# Altium PCB slave-14-mc33775.PcbDoc (part 5 of 5)
Units mil, origin at the board's own origin, x right, y up, seen from the top; angles counter-clockwise.
Board outline 6512.5 x 4562.01 mil, 6 copper layers (Top Copper, Supply, Signal Layer 1, Signal Layer 2, GND, Bot Copper), stack 69.773 mil thick; 427 components, 0 nets, 1131 pads, 1672 vias.
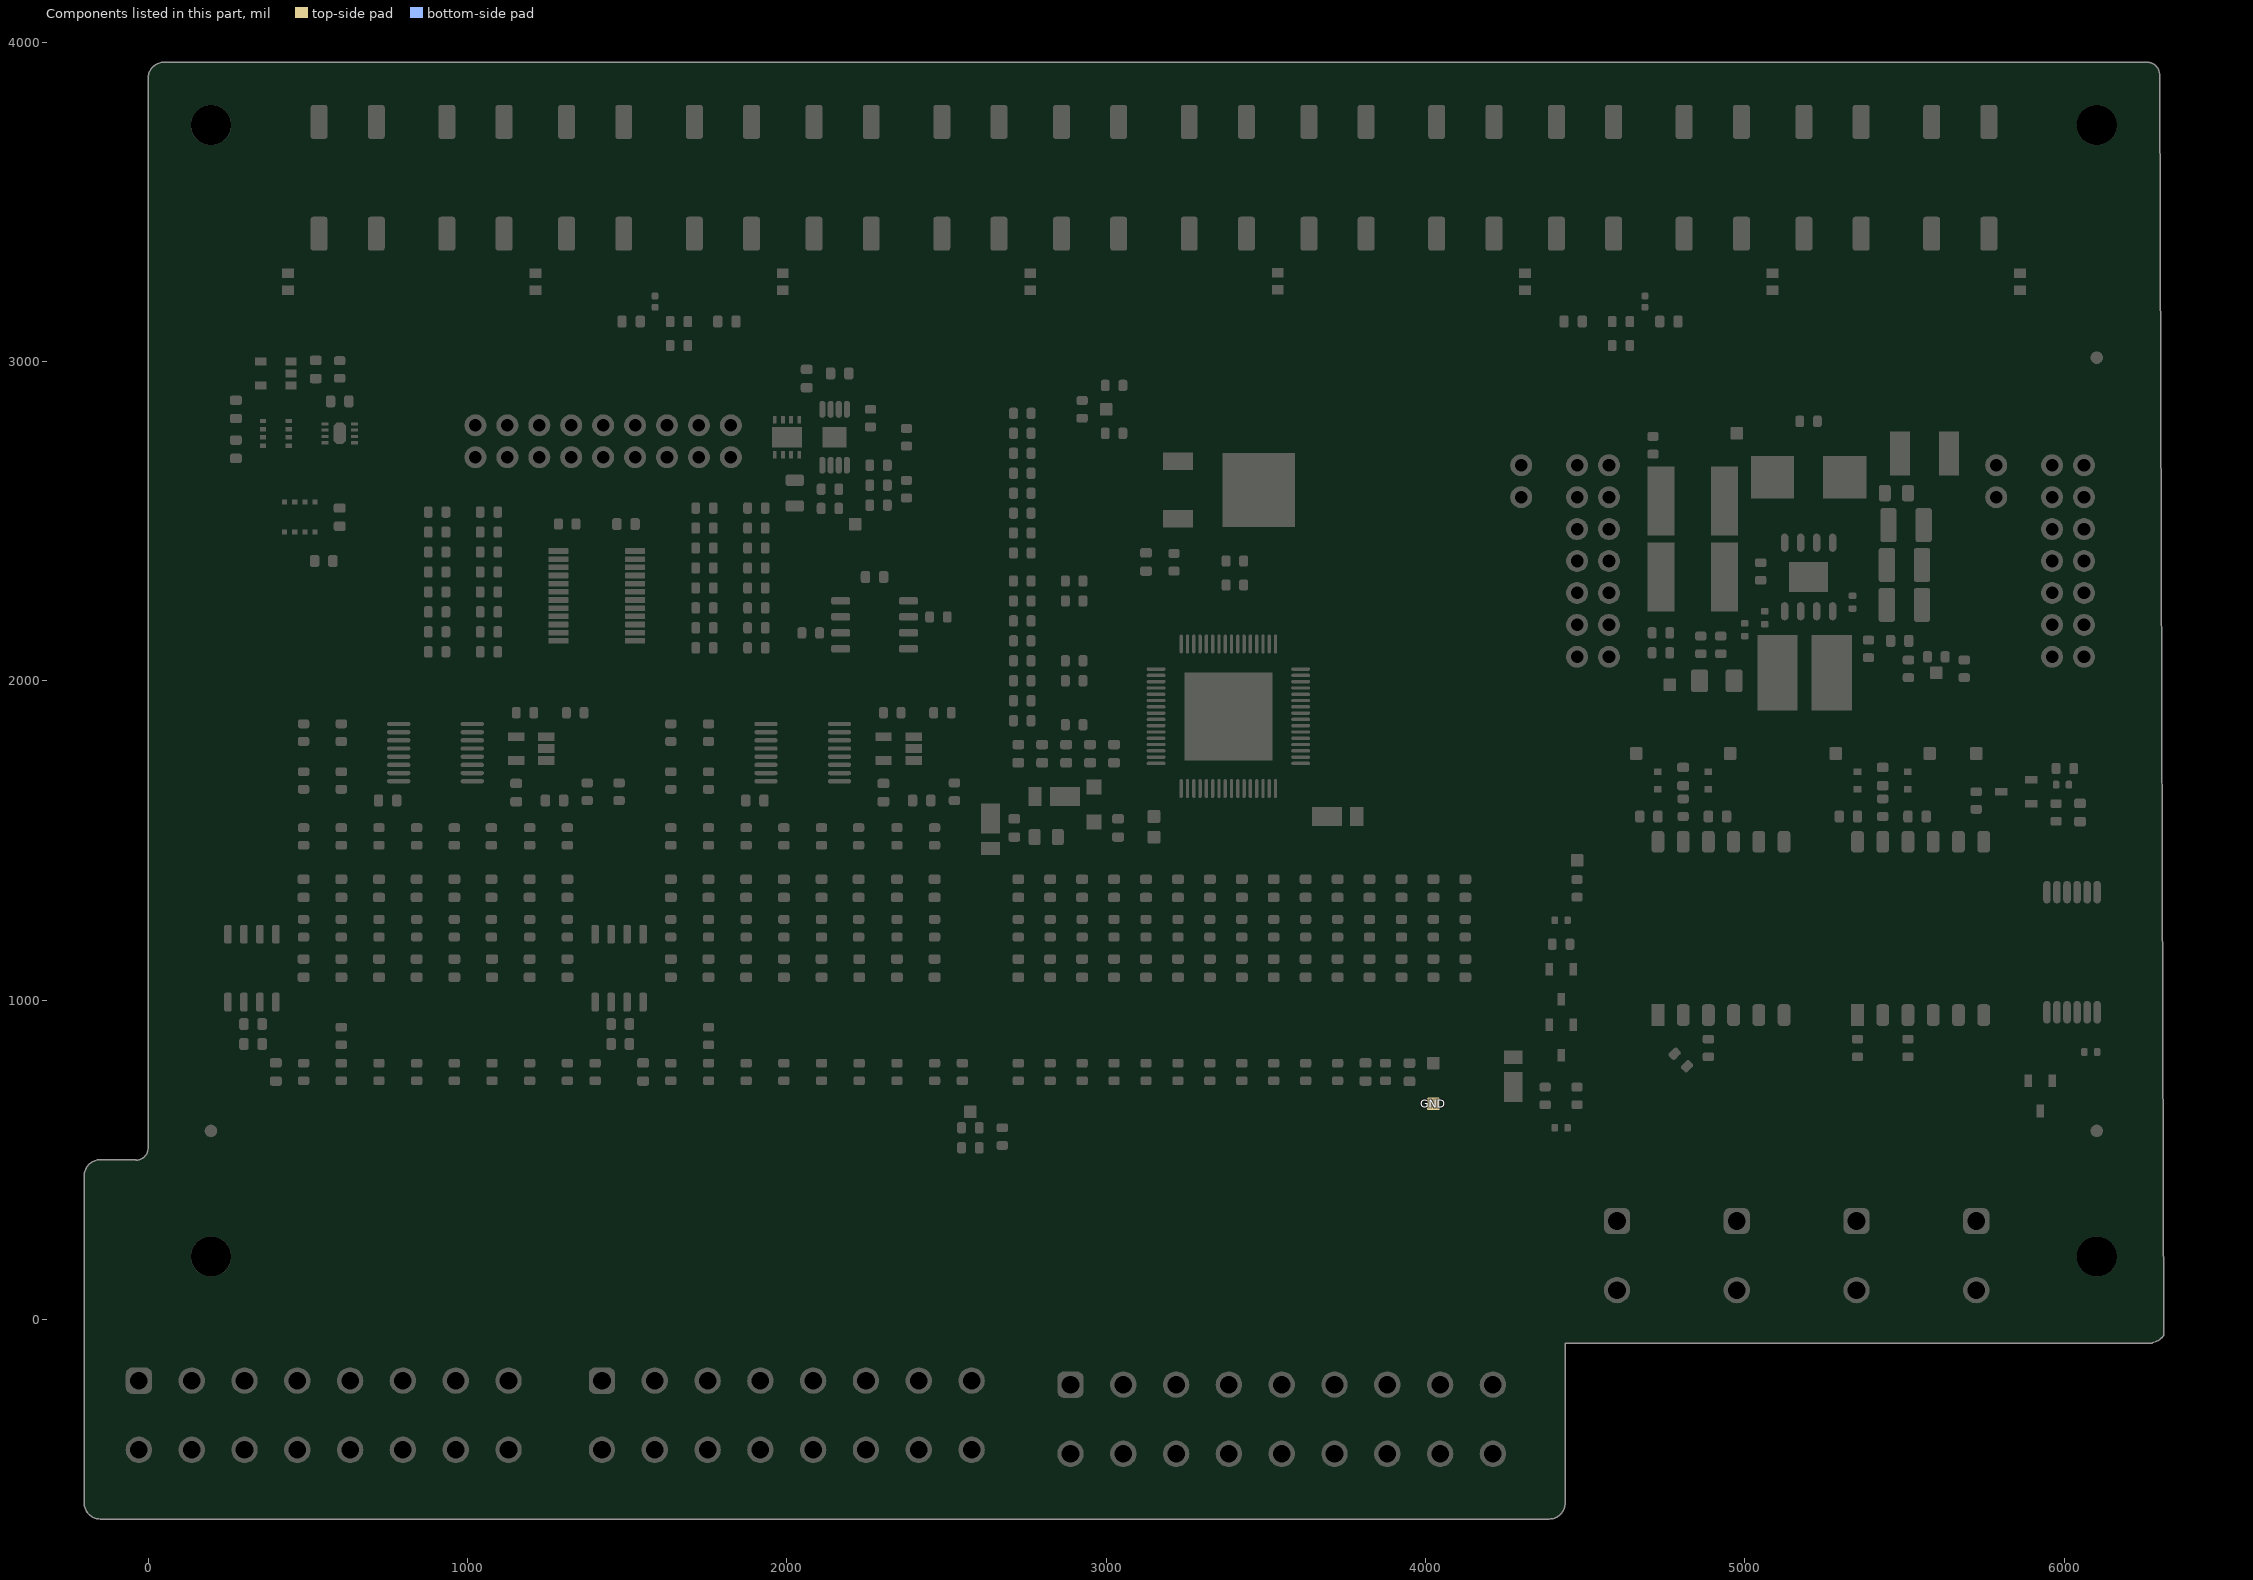
[diagram p9: the components of this part, seen from the top]

## Polygon pours and split planes (outlines as drawn) (continued)
no net on Signal Layer 1 "CIN8_L03_P022" (solid, pour order 22): 2587.5,3975 2937.5,3975 2937.5,3250 2587.5,3250
no net on Signal Layer 1 "BAL.CB_HI8_L03_P117" (solid, pour order 117): 2962.5,3975 3137.5,3975 3137.5,3250 2962.5,3250
no net on Signal Layer 1 "CIN4_L03_P090" (solid, pour order 90): 4137.5,3975 4487.5,3975 4487.5,3250 4137.5,3250
no net on Signal Layer 1 "BAL.CB_LO0_L03_P083" (solid, pour order 83): 5662.5,3975 5487.5,3975 5487.5,3250 5662.5,3250
no net on Signal Layer 1 "BAL.CB_LO4_L03_P081" (solid, pour order 81): 4112.5,3975 3937.5,3975 3937.5,3250 4112.5,3250
no net on Signal Layer 1 "BAL.CB_LO10_L03_P078" (solid, pour order 78): 1787.5,3975 1612.5,3975 1612.5,3250 1787.5,3250
no net on Signal Layer 1 "BAL.CB_HI4_L03_P075" (solid, pour order 75): 4512.5,3975 4687.5,3975 4687.5,3250 4512.5,3250
no net on Signal Layer 1 "BAL.CB_HI6_L03_P074" (solid, pour order 74): 3737.5,3975 3912.5,3975 3912.5,3250 3737.5,3250
no net on Signal Layer 1 "BAL.CB_HI14_L03_P070" (solid, pour order 70): 637.5,3975 812.5,3975 812.5,3250 637.5,3250
no net on Signal Layer 1 "CIN10_L03_P065" (solid, pour order 65): 1812.5,3975 2162.5,3975 2162.5,3250 1812.5,3250
no net on Signal Layer 1 "CIN6_L02_P023" (solid, pour order 67): 3362.5,3975 3712.5,3975 3712.5,3250 3362.5,3250
no net on Signal Layer 1 "CIN12_L03_P064" (solid, pour order 64): 1037.5,3975 1387.5,3975 1387.5,3250 1037.5,3250
no net on Signal Layer 1 "CIN2_L03_P069" (solid, pour order 69): 4912.5,3975 5262.5,3975 5262.5,3250 4912.5,3250
no net on Signal Layer 1 "BAL.CB_LO2_L03_P060" (solid, pour order 60): 4887.5,3975 4712.5,3975 4712.5,3250 4887.5,3250
no net on Signal Layer 1 "BAL.CB_LO6_L03_P058" (solid, pour order 58): 3337.5,3975 3162.5,3975 3162.5,3250 3337.5,3250
no net on Signal Layer 1 "BAL.CB_LO8_L03_P057" (solid, pour order 57): 2562.5,3975 2387.5,3975 2387.5,3250 2562.5,3250
no net on Signal Layer 1 "BAL.CB_LO12_L03_P055" (solid, pour order 55): 1012.5,3975 837.5,3975 837.5,3250 1012.5,3250
no net on Signal Layer 1 "BAL.CB_HI2_L03_P054" (solid, pour order 54): 5287.5,3975 5462.5,3975 5462.5,3250 5287.5,3250
no net on Signal Layer 1 "BAL.CB_HI10_L03_P050" (solid, pour order 50): 2187.5,3975 2362.5,3975 2362.5,3250 2187.5,3250
no net on Signal Layer 1 "BAL.CB_HI12_L03_P049" (solid, pour order 49): 1412.5,3975 1587.5,3975 1587.5,3250 1412.5,3250
no net on Signal Layer 2 "CIN0_L04_P085" (solid, pour order 85): 5687.5,3975 5687.5,3250 6299.21,3250 6299.21,3975
no net on Signal Layer 2 "CIN14_L04_P084" (solid, pour order 84): 612.5,3975 612.5,3250 0,3250 0,3975
no net on Signal Layer 2 "CIN6_L04_P045" (solid, pour order 45): 3362.5,3975 3712.5,3975 3712.5,3250 3362.5,3250
no net on Signal Layer 2 "CIN8_L04_P132" (solid, pour order 132): 2587.5,3975 2937.5,3975 2937.5,3250 2587.5,3250
no net on Signal Layer 2 "CIN10_L04_P109" (solid, pour order 109): 1812.5,3975 2162.5,3975 2162.5,3250 1812.5,3250
no net on Signal Layer 2 "BAL.CB_LO0_L04_P105" (solid, pour order 105): 5662.5,3975 5487.5,3975 5487.5,3250 5662.5,3250
no net on Signal Layer 2 "BAL.CB_LO10_L04_P100" (solid, pour order 100): 1787.5,3975 1612.5,3975 1612.5,3250 1787.5,3250
no net on Signal Layer 2 "BAL.CB_HI14_L04_P092" (solid, pour order 92): 637.5,3975 812.5,3975 812.5,3250 637.5,3250
no net on Signal Layer 2 "CIN2_L04_P091" (solid, pour order 91): 4912.5,3975 5262.5,3975 5262.5,3250 4912.5,3250
no net on Signal Layer 2 "CIN12_L04_P086" (solid, pour order 86): 1037.5,3975 1387.5,3975 1387.5,3250 1037.5,3250
no net on Signal Layer 2 "BAL.CB_LO2_L04_P082" (solid, pour order 82): 4887.5,3975 4712.5,3975 4712.5,3250 4887.5,3250
no net on Signal Layer 2 "BAL.CB_LO6_L04_P080" (solid, pour order 80): 3337.5,3975 3162.5,3975 3162.5,3250 3337.5,3250
no net on Signal Layer 2 "BAL.CB_LO8_L04_P079" (solid, pour order 79): 2562.5,3975 2387.5,3975 2387.5,3250 2562.5,3250
no net on Signal Layer 2 "BAL.CB_LO12_L04_P077" (solid, pour order 77): 1012.5,3975 837.5,3975 837.5,3250 1012.5,3250
no net on Signal Layer 2 "BAL.CB_HI10_L04_P072" (solid, pour order 72): 2187.5,3975 2362.5,3975 2362.5,3250 2187.5,3250
no net on Signal Layer 2 "BAL.CB_HI12_L04_P071" (solid, pour order 71): 1412.5,3975 1587.5,3975 1587.5,3250 1412.5,3250
no net on Signal Layer 2 "BAL.CB_HI4_L04_P097" (solid, pour order 97): 4512.5,3975 4687.5,3975 4687.5,3250 4512.5,3250
no net on Signal Layer 2 "BAL.CB_HI2_L04_P076" (solid, pour order 76): 5287.5,3975 5462.5,3975 5462.5,3250 5287.5,3250
no net on Signal Layer 2 "BAL.CB_HI8_L04_P029" (solid, pour order 29): 2962.5,3975 3137.5,3975 3137.5,3250 2962.5,3250
no net on Signal Layer 2 "CIN4_L04_P068" (solid, pour order 68): 4137.5,3975 4487.5,3975 4487.5,3250 4137.5,3250
no net on Signal Layer 2 "BAL.CB_LO4_L04_P059" (solid, pour order 59): 4112.5,3975 3937.5,3975 3937.5,3250 4112.5,3250
no net on Signal Layer 2 "BAL.CB_HI6_L04_P052" (solid, pour order 52): 3737.5,3975 3912.5,3975 3912.5,3250 3737.5,3250

## Keep-outs
Keep-Out Layer:
  circle w228.35: c196.85,196.85 r185.04
  circle w228.35: c6102.36,196.85 r185.04
  circle w228.35: c196.85,3740.16 r185.04
  circle w228.35: c6102.36,3740.16 r185.04

## Other copper
Top Copper:
  pour cut-out: 3987.5,1737.5 4112.5,1737.5 4112.5,1512.5 3987.5,1512.5
  pour cut-out: 5725,2737.5 5850,2737.5 5850,2512.5 5725,2512.5
  pour cut-out: 4237.5,2737.5 4362.5,2737.5 4362.5,2512.5 4237.5,2512.5
  pour cut-out: 362.5,2625 700,2625 700,2300 687.5,2287.5 362.5,2287.5
  text "TOP (1)" at 6244.68,3056.1 h40 r90
Signal Layer 1:
  pour cut-out: 3987.5,1737.5 4112.5,1737.5 4112.5,1512.5 3987.5,1512.5
  pour cut-out: 5725,2737.5 5850,2737.5 5850,2512.5 5725,2512.5
  pour cut-out: 4237.5,2737.5 4362.5,2737.5 4362.5,2512.5 4237.5,2512.5
  text "3" at 6244.68,3056.1 h40 r90
Signal Layer 2:
  pour cut-out: 3987.5,1737.5 4112.5,1737.5 4112.5,1512.5 3987.5,1512.5
  pour cut-out: 5725,2737.5 5850,2737.5 5850,2512.5 5725,2512.5
  pour cut-out: 4237.5,2737.5 4362.5,2737.5 4362.5,2512.5 4237.5,2512.5
  text "4" at 6244.69,3193.9 h40 r90
Supply:
  pour cut-out: 3987.5,1737.5 4112.5,1737.5 4112.5,1512.5 3987.5,1512.5
  pour cut-out: 5725,2737.5 5850,2737.5 5850,2512.5 5725,2512.5
  pour cut-out: 4237.5,2737.5 4362.5,2737.5 4362.5,2512.5 4237.5,2512.5
  pour cut-out: 4603.33,1516.81 4607.64,1516.81 4628.33,1537.5 6337.5,1537.5 6450,1425 6450,-50 4787.5,-50 4790.83,-46.67 4787.5,662.5 4607.64,825
  pour cut-out: 362.5,2625 700,2625 700,2300 687.5,2287.5 362.5,2287.5
  pour cut-out: 6350,1300 5900,1300 5900,1500 6050,1500 6350,1800 6450,1800 6450,1675 6350,1575
  pour cut-out: 4825,150 4800,500 4475,175 4350,50 4350,-50 4800,-50 4825,-25
  text "2" at 6244.68,3056.1 h40 r90
GND:
  pour cut-out: 3987.5,1737.5 4112.5,1737.5 4112.5,1512.5 3987.5,1512.5
  pour cut-out: 5725,2737.5 5850,2737.5 5850,2512.5 5725,2512.5
  pour cut-out: 4237.5,2737.5 4362.5,2737.5 4362.5,2512.5 4237.5,2512.5
  pour cut-out: 4603.33,1516.81 4607.64,1516.81 4628.33,1537.5 6337.5,1537.5 6450,1425 6450,-50 4787.5,-50 4790.83,-46.67 4787.5,662.5 4607.64,825
  pour cut-out: 4825,150 4800,500 4475,175 4350,50 4350,-50 4800,-50 4825,-25
  pour cut-out: 6350,1300 5900,1300 5900,1500 6050,1500 6350,1800 6450,1800 6450,1675 6350,1575
  pour cut-out: 362.5,2625 700,2625 700,2300 687.5,2287.5 362.5,2287.5
  text "5" at 6244.69,3193.9 h40 r90
Bot Copper:
  pour cut-out: 3987.5,1737.5 4112.5,1737.5 4112.5,1512.5 3987.5,1512.5
  pour cut-out: 5725,2737.5 5850,2737.5 5850,2512.5 5725,2512.5
  pour cut-out: 4237.5,2737.5 4362.5,2737.5 4362.5,2512.5 4237.5,2512.5
  text "BOT (6)" at 6244.69,3193.9 h40 r90

## Silkscreen, mask and mechanical layers (free items; w line width, h text height)
Top Overlay:
  drawing of 11 lines, arcs and shapes, not listed
  text "Passive Balancing" at 2693.42,3548.33 h118.11
  text "MCP9800" at 212.8,2885.14 h40 r90
  text "SHT35" at 775.3,2708.04 h40 r90
  text "BME280" at 212.64,2707.63 h40 r90
  text "↯" at 3787.5,2700 h1200
  text "HIGH" at 1700.4,2587.2 h40
  text "LOW" at 1864.61,2587.2 h40
  text "LOW" at 864.61,2574.7 h40
  text "HIGH" at 1025.4,2574.7 h40
  text "DANGER / high voltage / may be present" at 3637.36,2529.74 h60
  text "15" at 1805.76,2528.11 h40
  text "0" at 977.86,2515.61 h40
  text "14" at 1805.62,2465.38 h40
  text "1" at 980.56,2452.88 h40
  text "BME680" at 557.63,2412.36 h40
  text "13" at 1805.97,2403.11 h40
  text "2" at 977.58,2390.38 h40
  text "12" at 1806.11,2340.38 h40
  text "3" at 977.66,2328.11 h40
  text "11" at 1808.12,2277.88 h40
  text "4" at 976.98,2265.39 h40
  text "10" at 1806.09,2215.61 h40
  text "5" at 977.58,2203.34 h40
  text "9" at 1815.13,2153.11 h40
  text "6" at 977.63,2140.61 h40
  text "8" at 1815.25,2090.61 h40
  text "7" at 977.8,2078.11 h40
  text "foxBMS" at 3775,1950 h150
  text "Fraunhofer IISB / '.GlobalProject' v'.GlobalVersion'" at 177,1361.5 h60 r90
  text "CT1" at 3987.82,1291.44 h40 r90
  text "CT9" at 3187.8,1289.36 h40 r90
  text "CT8" at 3287.8,1289.32 h40 r90
  text "CT7" at 3387.82,1289.32 h40 r90
  text "CT6" at 3487.8,1289.16 h40 r90
  text "CT5" at 3587.8,1289.07 h40 r90
  text "CT4" at 3687.82,1288.94 h40 r90
  text "CT3" at 3787.8,1289.29 h40 r90
  text "CT2" at 3887.82,1289.42 h40 r90
  text "CT0" at 4087.8,1289.41 h40 r90
  text "CT11" at 2987.82,1281.5 h40 r90
  text "CT14" at 2687.82,1279 h40 r90
  text "CT13" at 2787.8,1279.35 h40 r90
  text "CT12" at 2887.82,1279.48 h40 r90
  text "CT10" at 3087.8,1279.47 h40 r90
  text "Input Filter" at 3125,920.96 h118.11
  text "Select Vmodule with 0R" at 2923.32,668.27 h60
  text "Temperature Measurement" at 801.55,622.64 h118.11
  text "Alarm / out" at 4525.66,594.9 h60
  text "Alarm / in" at 5675.66,594.88 h60
  text "TPL / low" at 4865.03,587.26 h60
  text "TPL / high" at 5240.03,587.26 h60
Bottom Overlay:
  text "DIO3" at 1234.97,2874.76 h40
  text "DIO7" at 1434.97,2874.76 h40
  text "DIO11" at 1634.97,2874.76 h40
  text "DIO15" at 1834.97,2874.76 h40
  text "DIO1" at 1134.98,2836.77 h40
  text "DIO5" at 1334.97,2836.77 h40
  text "DIO9" at 1534.97,2836.77 h40
  text "DIO13" at 1734.97,2836.77 h40
  text "GND" at 1934.97,2836.77 h40
  text "GND" at 4438.23,2784.97 h40 r90
  text "GND" at 4695.24,2784.97 h40 r90
  text "GND" at 5925.73,2784.97 h40 r90
  text "GND" at 6182.74,2784.97 h40 r90
  text "GND" at 4409.97,2711.77 h40
  text "GND" at 5897.47,2711.77 h40
  text "VAUX" at 4438.23,2684.97 h40 r90
  text "VDDC" at 4737.74,2684.97 h40 r90
  text "VAUX" at 5925.73,2684.97 h40 r90
  text "VDDC" at 6225.24,2684.97 h40 r90
  text "3.3V" at 4438.23,2584.97 h40 r90
  text "VDDIO" at 4695.24,2584.97 h40 r90
  text "3.3V" at 5925.73,2584.97 h40 r90
  text "VDDIO" at 6182.74,2584.97 h40 r90
  text "DIO0" at 1134.98,2579.76 h40
  text "DIO4" at 1334.97,2579.76 h40
  text "DIO8" at 1534.97,2579.76 h40
  text "DIO12" at 1734.97,2579.76 h40
  text "GND" at 1934.97,2579.76 h40
  text "DIO2" at 1234.97,2537.26 h40
  text "DIO6" at 1434.97,2537.26 h40
  text "DIO10" at 1634.97,2537.26 h40
  text "DIO14" at 1834.97,2537.26 h40
  text "ALRM_OUT" at 4400.24,2484.97 h40 r90
  text "ALRM_IN" at 4737.74,2484.97 h40 r90
  text "ALRM_OUT" at 5887.74,2484.97 h40 r90
  text "ALRM_IN" at 6225.24,2484.97 h40 r90
  text "VBAT" at 4409.97,2454.76 h40
  text "VBAT" at 5897.47,2454.76 h40
  text "SDA" at 4438.23,2384.97 h40 r90
  text "SCL" at 4695.24,2384.97 h40 r90
  text "SDA" at 5925.73,2384.97 h40 r90
  text "SCL" at 6182.74,2384.97 h40 r90
  text "GPIO7" at 4400.24,2284.97 h40 r90
  text "GPIO6" at 4737.74,2284.97 h40 r90
  text "GPIO7" at 5887.74,2284.97 h40 r90
  text "GPIO6" at 6225.24,2284.97 h40 r90
  text "GPIO3" at 4438.23,2184.97 h40 r90
  text "GPIO2" at 4695.24,2184.97 h40 r90
  text "GPIO3" at 5925.73,2184.97 h40 r90
  text "GPIO2" at 6182.74,2184.97 h40 r90
  text "GND" at 4159.97,1711.77 h40
  text "VBAT_ext" at 4159.97,1454.76 h40
  text "Alarm / out" at 4674.34,594.9 h60
  text "Alarm / in" at 5824.34,594.88 h60
  text "TPL / low" at 5084.97,587.26 h60
  text "TPL / high" at 5459.97,587.26 h60
  text "GND" at 596.98,524.76 h40
  text "GND" at 714.97,524.76 h40
  text "GND" at 832.97,524.76 h40
  text "GND" at 950.96,524.76 h40
  text "GND" at 1068.99,524.76 h40
  text "GND" at 1186.98,524.76 h40
  text "GND" at 1304.97,524.76 h40
  text "GND" at 1422.97,524.76 h40
  text "GND" at 1746.98,524.76 h40
  text "GND" at 1864.97,524.76 h40
  text "GND" at 1982.97,524.76 h40
  text "GND" at 2100.96,524.76 h40
  text "GND" at 2218.99,524.76 h40
  text "GND" at 2336.98,524.76 h40
  text "GND" at 2454.97,524.76 h40
  text "GND" at 2572.97,524.76 h40
  text "NC" at 2909.97,524.76 h40
  text "NC" at 3023.99,524.76 h40
  text "NC" at 3141.98,524.76 h40
  text "NC" at 3259.97,524.76 h40
  text "CIN14" at 3377.97,524.76 h40
  text "CIN12" at 3495.96,524.76 h40
  text "CIN10" at 3613.99,524.76 h40
  text "CIN8" at 3731.98,524.76 h40
  text "CIN6" at 3849.97,524.76 h40
  text "CIN4" at 3967.97,524.76 h40
  text "CIN2" at 4085.96,524.76 h40
  text "CIN0" at 4204.46,524.76 h40
  text "N" at 4622.47,437.26 h60
  text "N" at 4902.78,437.26 h60
  text "N" at 5277.77,437.26 h60
  text "N" at 5652.77,437.26 h60
  text "P" at 4622.47,319.27 h60
  text "P" at 4902.21,318.51 h60
  text "P" at 5277.21,318.51 h60
  text "P" at 5652.21,318.51 h60
  text "T15" at 596.98,249.76 h60
  text "T14" at 714.97,249.76 h60
  text "T13" at 832.97,249.76 h60
  text "T12" at 950.96,249.76 h60
  text "T11" at 1068.99,249.76 h60
  text "T10" at 1186.98,249.76 h60
  text "T9" at 1304.97,249.76 h60
  text "T8" at 1422.97,249.76 h60
  text "T7" at 1746.98,249.76 h60
  text "T6" at 1864.97,249.76 h60
  text "T5" at 1982.97,249.76 h60
  text "T4" at 2100.96,249.76 h60
  text "T3" at 2218.99,249.76 h60
  text "T2" at 2336.98,249.76 h60
  text "T1" at 2454.97,249.76 h60
  text "T0" at 2572.97,249.76 h60
  text "NC" at 2905.49,249.76 h40
  text "NC" at 3023.99,249.76 h40
  text "NC" at 3141.98,249.76 h40
  text "VBAT" at 3259.97,249.76 h40
  text "CIN13" at 3377.97,249.76 h40
  text "CIN11" at 3495.96,249.76 h40
  text "CIN9" at 3613.99,249.76 h40
  text "CIN7" at 3731.98,249.76 h40
  text "CIN5" at 3849.97,249.76 h40
  text "CIN3" at 3967.97,249.76 h40
  text "CIN1" at 4085.96,249.76 h40
  text "GND" at 4204.46,249.76 h40
Mechanical 1:
  lines w78.74: 225,3100 775,3100 ; 700,2337.5 650,2287.5 387.5,2287.5 337.5,2337.5 337.5,2587.5 387.5,2637.5 650,2637.5 700,2587.5 ; 4787.5,100 4787.5,675 4625,837.5 4625,1350 5037.5,1350 ; 4812.5,1112.5 5237.5,1112.5 ; 5162.5,100 5162.5,875 5237.5,950 5237.5,962.5 5237.5,1350 5675,1350 ; 5450,1112.5 5875,1112.5 ; 5537.5,100 5537.5,612.5 5837.5,912.5 5837.5,1012.5 5875,1050 5875,1225 6025,1225 6025.77,1225 6095.79,1154.98 6129.98,1154.98 6187.5,1212.5 6200,1225 6200,1400 6150,1450
Board_Outline:
  lines w5.91: -39.37,498.13 ccw(c-39.37,537.5) 0,537.5 0,3887.01 cw(c50,3887.01) 50,3937.01 6259.84,3937.01 cw(c6259.84,3897.64) 6299.21,3897.64 6312.42,-50 ; 6276.09,-73.41 ccw(c6262.92,-12.92) 6312.5,-50
  lines w10: -37.5,500 -150,500 ccw(c-150,450) -200,450 -200,-575 ccw(c-150,-575) -150,-625 4387.5,-625 ccw(c4387.5,-575) 4437.5,-575 4437.5,-75 6275,-75